# EAGLE board Electronic Voting Machine (EAGLE 9.7.0)

Size 180.39 x 103.28 mm. Coordinates in mm from the lower left corner, seen from the top.
Outline: 0,0 180.39,0 180.39,103.28 0,103.28 0,0
Copper layers (1*16): Top 0.035mm / dielectric 1.5mm / Bottom 0.035mm
Design rules "default": minimum track width 6mil, minimum drill 0.35mm, track to track 6mil, track to pad 6mil, pad to pad 6mil, via to via 6mil, smd to smd 6mil, copper to edge 40mil, drill to drill 6mil, minimum pad ring 10mil, minimum via ring 8mil, stop-mask expansion 4mil, vias tented up to drill 0mil, thermal gap 10mil

## Footprints (pad centres in the part's own frame; a part is rotated, then mirrored left to right if it is on the bottom)
LEDRD254W60D565H860B = drill 0.981 pad 1.581: 1 -1.27,0; 2 1.27,0
PIEZO = drill 1 pad 1.6: 1 -3.5,0; 2 3.5,0
RESAD1016W63L850D250B = drill 0.83 pad 1.43: 1 -5.08,0; 2 5.08,0
SWITCH-MOMENTARY-PTH-6.5MM = drill 1.016 pad 1.88: 1 -3.251,2.261; 2 3.251,2.261; 3 -3.251,-2.261; 4 3.251,-2.261
ARDUINO-UNO-R3-SHIELD = drill 1.016 pad 1.88: 3.3V 24.13,-2.54; 5V 24.13,0; A0 24.13,12.7; A1 24.13,15.24; A2 24.13,17.78; A3 24.13,20.32; A4 24.13,22.86; A5 24.13,25.4; AREF -24.13,-13.97; D2 -24.13,20.32; D3 -24.13,17.78; D4 -24.13,15.24; D5 -24.13,12.7; D6 -24.13,10.16; D7 -24.13,7.62; D8 -24.13,3.81; D9 -24.13,1.27; D10 -24.13,-1.27; D11 -24.13,-3.81; D12 -24.13,-6.35; D13 -24.13,-8.89; GND@0 24.13,2.54; GND@1 24.13,5.08; GND@2 -24.13,-11.43; IOREF 24.13,-7.62; NC 24.13,-10.16; RES 24.13,-5.08; RX -24.13,25.4; SCL -24.13,-19.05; SDA -24.13,-16.51; TX -24.13,22.86; VIN 24.13,7.62
LCD-I2C = drill 1.016 long: 1 -19.05,-5.08; 2 -19.05,-7.62; 3 -19.05,-10.16; 4 -19.05,-12.7

## Placement (x,y rotation side)
D1  RED  [LEDRD254W60D565H860B]  128.02,95.37 180 top
PIEZO1  PIEZO  [PIEZO]  168.66,85.21 0 top
R1  470  [RESAD1016W63L850D250B]  129.29,87.75 90 top
S1  SWITCH_MOMENTARY  [SWITCH-MOMENTARY-PTH-6.5MM]  40.39,89.02 90 top
S2  SWITCH_MOMENTARY  [SWITCH-MOMENTARY-PTH-6.5MM]  48.01,89.02 90 top
S3  SWITCH_MOMENTARY  [SWITCH-MOMENTARY-PTH-6.5MM]  55.63,89.02 90 top
S4  SWITCH_MOMENTARY  [SWITCH-MOMENTARY-PTH-6.5MM]  63.25,89.02 90 top
S5  SWITCH_MOMENTARY  [SWITCH-MOMENTARY-PTH-6.5MM]  70.87,89.02 90 top
S6  SWITCH_MOMENTARY  [SWITCH-MOMENTARY-PTH-6.5MM]  78.49,89.02 90 top
S7  SWITCH_MOMENTARY  [SWITCH-MOMENTARY-PTH-6.5MM]  86.11,89.02 90 top
S8  SWITCH_MOMENTARY  [SWITCH-MOMENTARY-PTH-6.5MM]  93.73,89.02 90 top
S10  SWITCH_MOMENTARY  [SWITCH-MOMENTARY-PTH-6.5MM]  101.35,89.02 90 top
U1  ARDUINO-UNO-R3-SHIELD  [ARDUINO-UNO-R3-SHIELD]  47.88,29.84 270 top
U2  LCD-16X2-I2CSUNFOUNDER-IIC  [LCD-I2C]  111.95,47.64 0 top

## Library data of the parts
D1 = Tinkercad; CATEGORY: Opto-Electronic; SUB-CATEGORY: LED; VALUE: LED_RED
PIEZO1 R1 S1-S8 S10 U1 U2 = Tinkercad

## Nets
D1_A: D1.1 R1.2
U1_5V: U1.5V U2.2
U1_D2: PIEZO1.1 U1.D2
U1_D3: R1.1 U1.D3
U1_D5: S10.1 S10.2 U1.D5
U1_D6: S8.1 S8.2 U1.D6
U1_D7: S7.1 S7.2 U1.D7
U1_D8: S6.1 S6.2 U1.D8
U1_D9: S5.1 S5.2 U1.D9
U1_D10: S4.1 S4.2 U1.D10
U1_D11: S3.1 S3.2 U1.D11
U1_D12: S2.1 S2.2 U1.D12
U1_D13: S1.1 S1.2 U1.D13
U1_GND: D1.2 PIEZO1.2 S1.3 S1.4 S2.3 S2.4 S3.3 S3.4 S4.3 S4.4 S5.3 S5.4 S6.3 S6.4 S7.3 S7.4 S8.3 S8.4 S10.3 S10.4 U1.GND@0 U1.GND@1 U1.GND@2 U2.1
U1_SCL: U1.SCL U2.4
U1_SDA: U1.SDA U2.3

## Tracks (layer width: path | path; a pad name or v marks a point on that pad's centre or on a via)
D1_A  (1 unrouted)
U1_5V  (1 unrouted)
U1_D2  (1 unrouted)
U1_D3  (1 unrouted)
U1_D5  (2 unrouted)
U1_D6  (2 unrouted)
U1_D7  (2 unrouted)
U1_D8  (2 unrouted)
U1_D9  (2 unrouted)
U1_D10  (2 unrouted)
U1_D11  (2 unrouted)
U1_D12  (2 unrouted)
U1_D13  (2 unrouted)
U1_GND  (23 unrouted)
U1_SCL  (1 unrouted)
U1_SDA  (1 unrouted)